# Altium PCB PCB1.PcbDoc
Units mm, origin at the board's own origin, x right, y up, seen from the top; angles counter-clockwise.
Board outline 29 x 20 mm, 2 copper layers (Top Layer, Bottom Layer); 3 components, 4 nets, 19 pads, 0 vias.
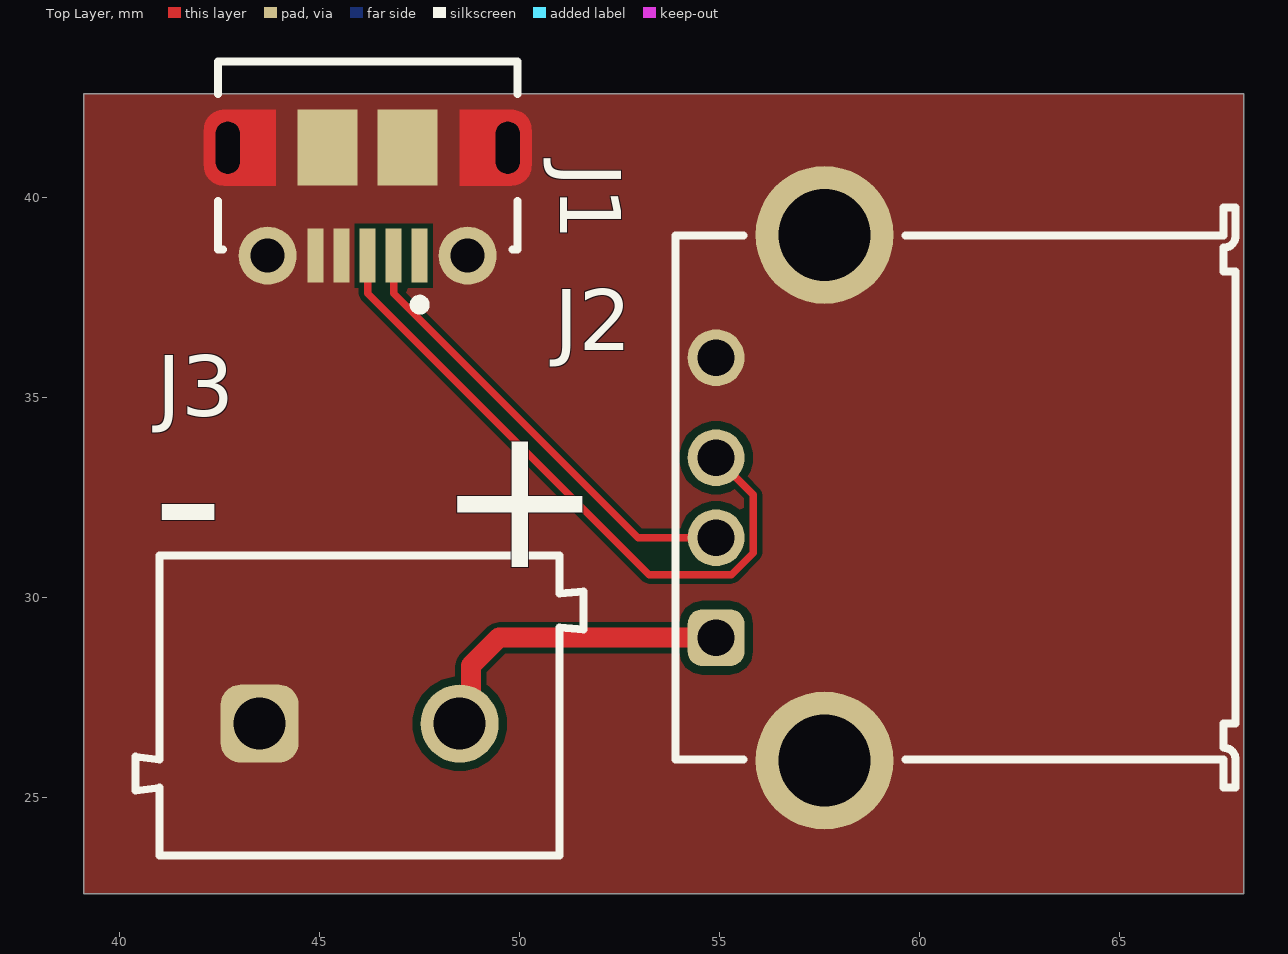
[diagram p0: Top Layer view]
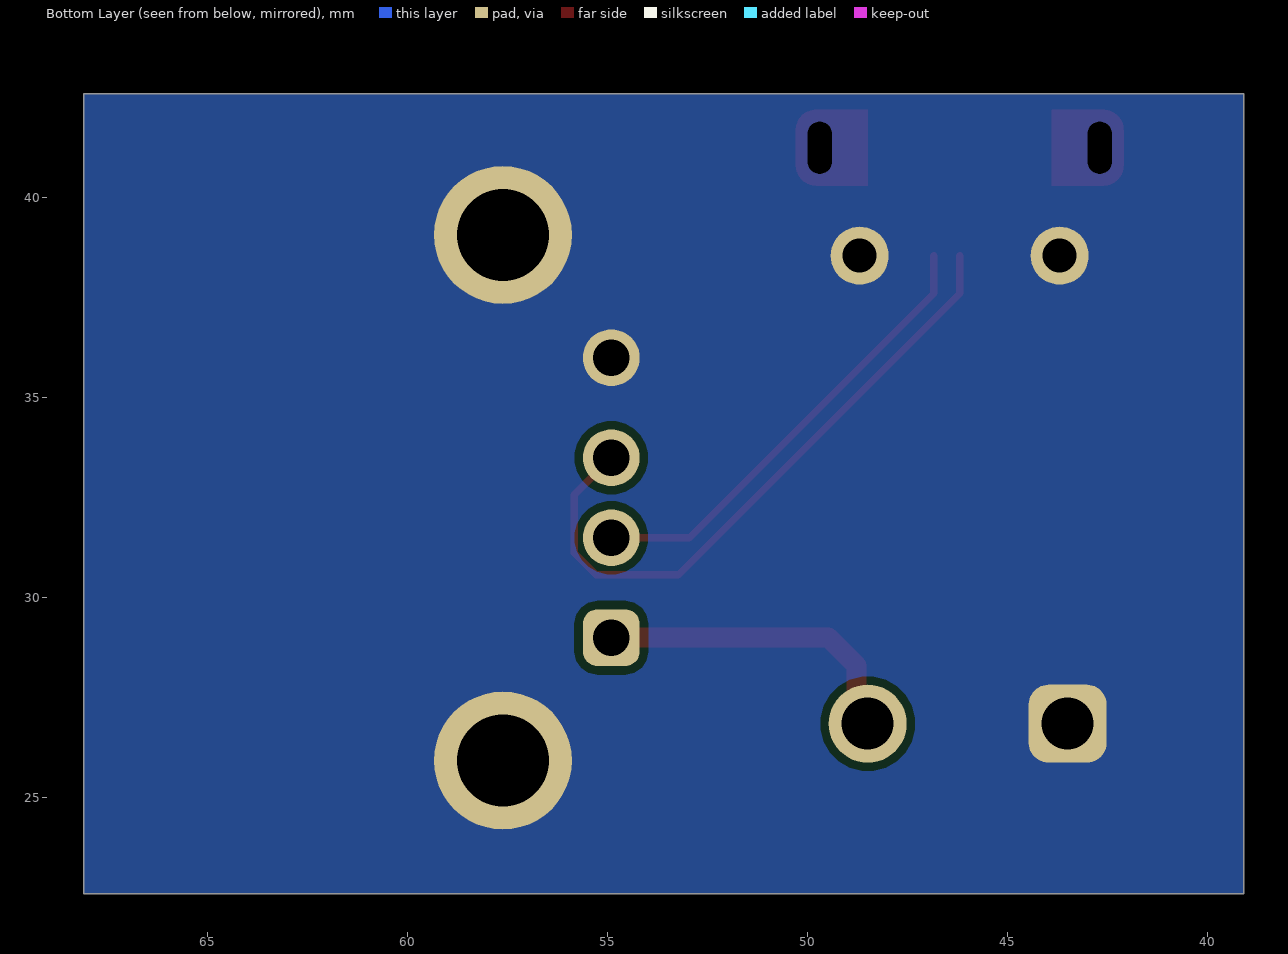
[diagram p1: Bottom Layer view, seen from below]
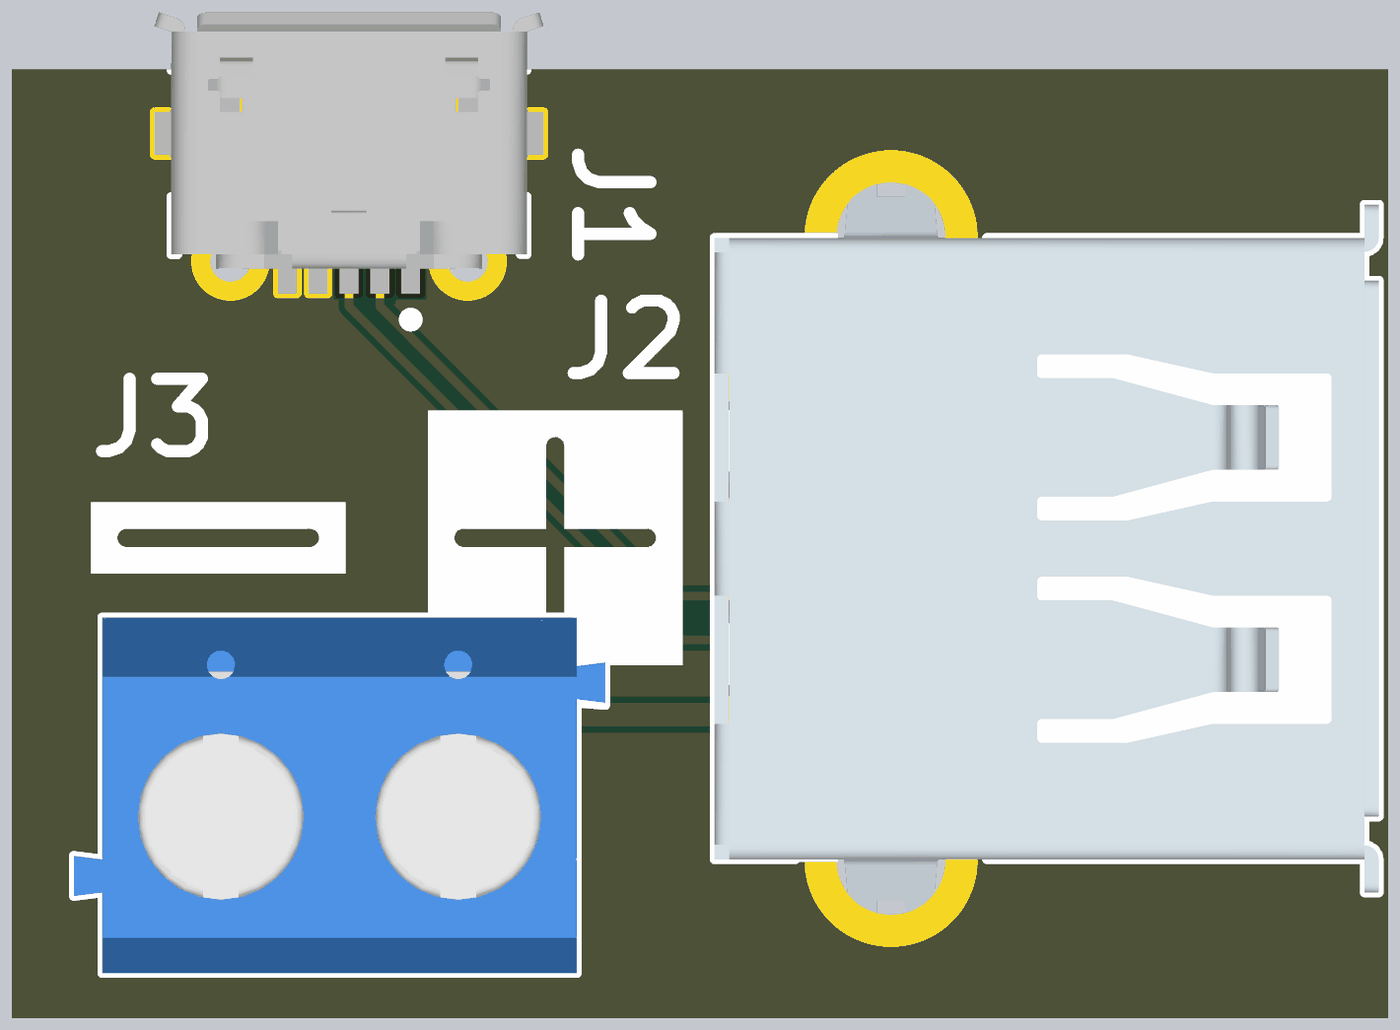
[diagram p2: 3D render of the assembled board from above, using the file's embedded part models]

## Layer stack, top to bottom
Top Solder: solder mask 0.0102, Solder Resist, Dk 3.5
Top Layer: signal copper 0.0356
Dielectric 1: dielectric 0.32, FR-4, Dk 4.8
Bottom Layer: signal copper 0.0356
Bottom Solder: solder mask 0.0102, Solder Resist, Dk 3.5

## Board outline
39.1,22.6 39.1,42.6 68.1,42.6 68.1,22.6

## Design rules (kind name [scope] priority, off if disabled: settings)
Clearance Clearance_POWER [(InNet('NetC205_2') OR InNet('NETC203_2') OR InNet('NETC206_2') OR InNet('NetP410_1') OR InNet('NetP410_3') OR InNet('VM'))] p1: gap=0.254 ignorepadtopadclearanceinfootprint=FALSE except(0: SMDPad-Hole THPad-Hole Via-Hole Fill-Hole Poly-Hole Region-Hole Text-Hole; 0.1: Arc-Arc Arc-Track Track-Track; 0.127: Arc-THPad Arc-Fill Arc-Poly Arc-Region Track-THPad Track-Fill Track-Poly Track-Region SMDPad-SMDPad; 0.2: Arc-SMDPad Track-SMDPad; 0.5: THPad-THPad THPad-Fill THPad-Poly THPad-Region Fill-Fill Fill-Poly Fill-Region Poly-Poly Poly-Region Region-Region)
Clearance [All] p2: gap=0.127 ignorepadtopadclearanceinfootprint=FALSE except(0: SMDPad-Hole THPad-Hole Via-Hole Fill-Hole Poly-Hole Region-Hole Text-Hole; 0.1: Arc-Arc Arc-Track Track-Track; 0.2: Arc-SMDPad Track-SMDPad THPad-Fill THPad-Poly THPad-Region Via-Fill Via-Poly Via-Region; 0.254: Arc-Via Arc-Text Arc-Hole Track-Via Track-Text Track-Hole SMDPad-THPad SMDPad-Via SMDPad-Text THPad-Via THPad-Text Via-Via Via-Text Fill-Text Poly-Text Region-Text Text-Text; 0.5: THPad-THPad)
ComponentClearance [All] p1: gap=0.127 collisioncheckmode=3 verticalgap=0.254 showdistances=FALSE
HoleSize [All] p1: absolutevalues=TRUE maxlimit=6.5 minlimit=0.025 maxpercent=80.000 minpercent=20.000
MinimumSolderMaskSliver [All] p1: minsoldermaskwidth=0.08
PlaneClearance [All] p1: clearance=0.2
PlaneConnect [All] p1: planeconnectstyle=Direct reliefexpansion=0.508 reliefentries=4 reliefconductorwidth=0.254 reliefairgap=0.254
PolygonConnect PolygonConnect_GND_POWER [InNet('GND') vs (HasFootprint('FP-FC-G-MFG') OR HasFootprint('FP-CL32-IPC_B') OR HasFootprint('TSON Advance_TOS') OR HasFootprint('XT60+MR60') OR HasFootprint('XT-60') OR HasFootprint('FP-SMAJ-CA-MFG') OR InNamedPolygon('GND_L01_P000'))] p1: connectstyle=Direct reliefconductorwidth=0.254 reliefentries=4 polygonreliefangle="90 Angle" airgapwidth=0.254
PolygonConnect PolygonConnect_GND [InNet('GND')] p2: thpad.connectstyle=Direct thpad.reliefconductorwidth=0.254 thpad.reliefentries=4 thpad.polygonreliefangle="90 Angle" thpad.airgapwidth=0.254 smdpad.connectstyle=Relief smdpad.reliefconductorwidth=0.2 smdpad.reliefentries=4 smdpad.polygonreliefangle="90 Angle" smdpad.airgapwidth=0.2 via.connectstyle=Direct via.reliefconductorwidth=0.254 via.reliefentries=4 via.polygonreliefangle="90 Angle" via.airgapwidth=0.254
PolygonConnect [All] p3: connectstyle=Direct reliefconductorwidth=0.254 reliefentries=4 polygonreliefangle="90 Angle" airgapwidth=0.254
RoutingVias [All] p1: holewidth=0.3 width=0.45 viastyle="Through Hole" minholewidth=0.3 minwidth=0.45 maxholewidth=0.55 maxwidth=0.7
SilkToSilkClearance [All] p1: silktosilkclearance=0
SilkToSolderMaskClearance [IsPad] p1: minsilkscreentomaskgap=0.15 clearancetoexposedcopper=TRUE
SolderMaskExpansion [All] p1: expansion=0.1 istentingtop=FALSE
Width Width_voltage [InNetClass('Voltage')] p1: maxlimit=0.5 minlimit=0.18 preferedwidth=0.18 minimp=50.000000 maximp=50.000000 favimp=50.000000
Width [All] p2: maxlimit=0.5 minlimit=0.127 preferedwidth=0.18 minimp=50.000000 maximp=50.000000 favimp=50.000000
23 further rules are at their usual default settings.

## Components (designator, comment, footprint, x,y, rotation, side; value= is the part's Value field where it differs from the comment)
J1 "105017-0001" USB-MICRO-B_V 46.2,39.9 r180 top
J2 "61400416021" 61400416021 60.9,32.5 r90 top
J3 "POWER" 691102710002 46,27.3 r0 top

## Footprints (in the part's own frame and the unit in brackets; to place one, negate y for a bottom-side part, rotate by r counter-clockwise, add the part's x,y. Pads: shape width x height; smd on the part's side, far side on the other; paste and mask are expansions set on the pad)
61400416021 [mm] "USB 2.0 Type A Horizontal"
  rrect50% 1.42x1.42 hole 0.92: 1(-3.5,5.99)
  round 1.42 hole 0.92: 2(-1,5.99) 3(1,5.99) 4(3.5,5.99)
  round 3.45 hole 2.3: Shell(-6.57,3.28) Shell(6.57,3.28)
  silkscreen extent -7.25,-7 7.25,7, body extent -8,-7 8,7, height 7.63
691102710002 [mm] "5,00mm - modular - blue - Horizontal entry with pressure clamp - 9,9 mm height - 02p"
  rrect50% 1.95x1.95 hole 1.3: 1(-2.5,-0.45)
  round 1.95 hole 1.3: 2(2.5,-0.45)
  silkscreen extent -5.6,-3.75 5.6,3.75, body extent -5.6,-3.75 5.6,3.75, height 9.96
USB-MICRO-B_V [mm] "USB, MICRO B, Body 7.491x4.695 mm, Pitch 0.65 mm"
  rect 0.4x1.35 smd: 1(-1.3,1.35) 2(-0.65,1.35) 3(0,1.35) 4(0.65,1.35) 5(1.3,1.35)
  round 1.45 hole 0.85: 6(-2.5,1.35) 7(2.5,1.35)
  rrect50% 0x0 hole 0.6 slot 1.3 at 90 deg: 8(-3.5,-1.35) 11(3.5,-1.35)
  rect 1.5x1.9 smd: 9(-1,-1.35) 10(1,-1.35)
  Top Layer circle w0.5: c-3.6,-1.8 r0.25
  Top Layer circle w0.5: c-3.6,-0.9 r0.25
  Top Layer circle w0.5: c3.6,-1.8 r0.25
  Top Layer circle w0.5: c3.6,-0.9 r0.25
  Top Layer region: -3.6,-1.8 -3.6,-0.9 -4.1,-0.9 -4.1,-1.8
  Top Layer region: 3.6,-0.9 3.6,-1.8 4.1,-1.8 4.1,-0.9
  Top Layer region: 2.3,-0.4 2.3,-2.3 3.6,-2.3 3.6,-0.4
  Top Layer region: -2.3,-2.3 -2.3,-0.4 -3.6,-0.4 -3.6,-2.3
  silkscreen extent -3.75,-3.5 3.75,2.7, body extent -4.1,-3.9 4.1,1.5, height 2.67

## Part data
J1: library part CMP-2000-05827-1, "Micro-USB B Receptacle, Right Angle, Bottom Mount, Surface Mount, with Solder Tabs, -30 to 85 degC, 5-Pin USB, RoHS, Tape and Reel", Manufacturer=Molex, Package Description="5-Leads USB, Micro B, Body 7.5 x 5 mm, Pitch 0.65 mm", Package Reference=MICRO-B, Package Version="Rev. F, 12/2012", Standard Package=1, Voltage - Max=30V, 3D Model=105017-0001.stp, Catalog Drawings=1050170001, Category=Connectors,Interconnects, Circuits=5, Connector Type=USB-microB, Datasheet URL=http://www.molex.com/elqNow/elqRedir.htm?ref=http://www.molex.com/webdocs/datasheets/pdf/en-us/1050170001_IO_CONNECTORS.pdf, Datasheet Version=03/2016, Family=USB,DVI,HDMIConnectors, Featured Product=Micro-USBConnectorsUSBConnectors, Features=Shielded,SolderRetention, Gender=Receptacle, Ingress Protection=-, Manufacturer URL=http://www.molex.com/, Mating Products=WM17145-ND-CABLEMICROUSBBTOSTDA1.0MWM17147-ND-CABLEMICROUSBBTOSTDA2.0MWM17146-ND-CABLEMICROUSBBTOSTDA1.5M, Mounting Technology=SurfaceMount, Mounting Type=BoardCutout,SurfaceMount,RightAngle, Number of Contacts=5, Online Catalog=Molex-MicroUSB, Other Names=WM1399DKR, Package URL=http://www.molex.com/pdm_docs/sd/1050170001_sd.pdf, Packaging=Digi-Reel®, PCN Assembly/Origin=ResinSupplier21/Oct/2015, RoHS Information=1050170001CertofCompliance, Series=-, Specifications=-
J2: library part CMP-1502-03227-2, Color=White, Contact Resistance=20mΩ, Current Rating=1.5A, Flammability Rating="UL94 V-0", Insulation Resistance=1GΩ, Max Operating Temperature=105°C, Min Operating Temperature=-40°C, Operating Supply Voltage=30V, Connector Type=USB, Contact Material=Copper, Contact Plating=Gold, Gender=Receptacle, Insulation Material=PBT, Lead Free="Lead Free", Length=15.8mm, Mount="Horizontal, Through Hole", NexarPartId=21041530, Number of Contacts=4, Number of Pins=4, Number of Ports=1, Number of Positions=4, Orientation=Horizontal, REACH SVHC=Unknown, RoHS=Compliant, Termination=Solder, USB Standard="USB 2.0", Voltage Rating=30V, Voltage Rating (DC)=30V, Width=14.4mm
J3: library part CMP-1502-03258-2, Color=Blue, Current=15A, Max Operating Temperature=105°C, Min Operating Temperature=-40°C, Voltage=300V, Contact Material=Brass, Contact Plating=Tin, Current Rating=15A, Height=13.4mm, Housing Material=Nylon, Lead Pitch=5mm, Length=7.5mm, Mount="Through Hole", NexarPartId=8917706, Number of Contacts=2, Number of Levels=1, Number of Pins=2, Number of Positions Per Level=2, Packaging=Box, Pitch=5.0038mm, Plating=Steel, REACH SVHC=Unknown, RoHS=Compliant, Stripping Length=-6mm, Termination=Screw, Voltage Rating=300V, Width=11.2mm, Wire Gauge (Max)=22AWG, Wire Gauge (Min)=14AWG, Wire/Cable Gauge=22AWG

## Nets (pads, with @x,y where several pads share a name; then routed paths per layer and width w, separated by ;. In a path a pad name is that pad's centre, name@x,y a point inside that pad or via, vN(x,y) a via of type N, cw(c..) or ccw(c..) an arc to the next point about the centre after c; other vN are vias at no path point)
NetJ1_2: J1.2 J2.2 | length 11.5
  Top Layer w0.18: J1.2 46.85,37.605 52.955,31.5 J2.2
NetJ1_3: J1.3 J2.3 | length 16.5
  Top Layer w0.18: J1.3 46.2,37.605 53.232,30.573 55.294,30.573 55.837,31.116 55.837,32.573 J2.3
NetJ1_4: J1.4 J1.5 J1.6 J1.7 J1.8 J1.9 J1.10 J1.11 J2.4 J2.Shell J3.1
NetJ2_1: J2.1 J3.2 | length 8
  Top Layer w0.5: J3.2 48.777,27.127 48.777,28.301 49.476,29 J2.1
pads on no net: J1.1

## Polygon pours and split planes (outlines as drawn)
NetJ1_4 on Bottom Layer "NONET_L-01_P-001" (solid, pour order 1): 39.1,42.6 39.1,22.6 68.1,22.6 68.1,42.6
NetJ1_4 on Top Layer "NONET_L-01_P-001" (solid, pour order 0): 39.1,42.6 68.1,42.6 68.1,22.6 39.1,22.6

## Silkscreen, mask and mechanical layers (free items; w line width, h text height)
Top Overlay:
  text "-" at 40.807,30.761 h5.08
  text "+" at 47.907,30.761 h5.08
Mechanical 1:
  the board outline again, w0.2

## Text inside footprints (layer, text, board x,y; h text height)
J1: Mechanical 1 "PCB EDGE" at 53.4,42.8 h0.3 r180
J2: Top 3D Body "PCB Edge" at 69.12,30.3 h0.81 r90